# Altium PCB MP3 Player.PcbDoc
Units mil, origin at the board's own origin, x right, y up, seen from the top; angles counter-clockwise.
Board outline 1874.02 x 3145.67 mil, 2 copper layers (Top Layer, Bottom Layer); 47 components, 66 nets, 295 pads, 155 vias.
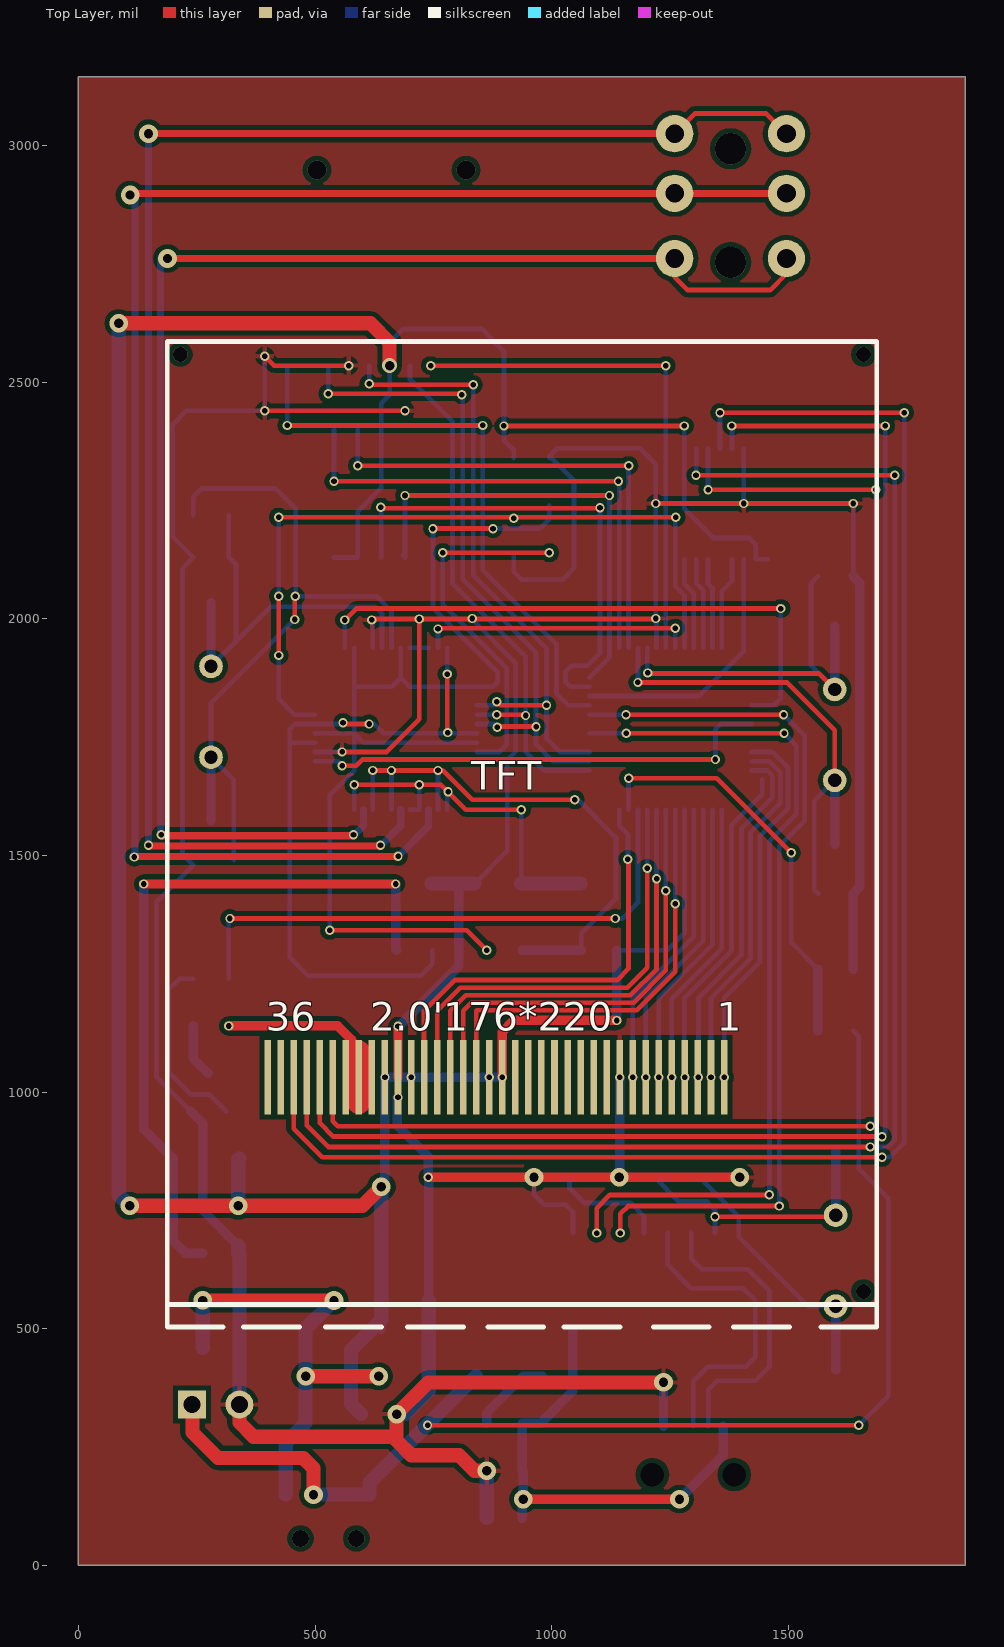
[diagram p0: Top Layer view]
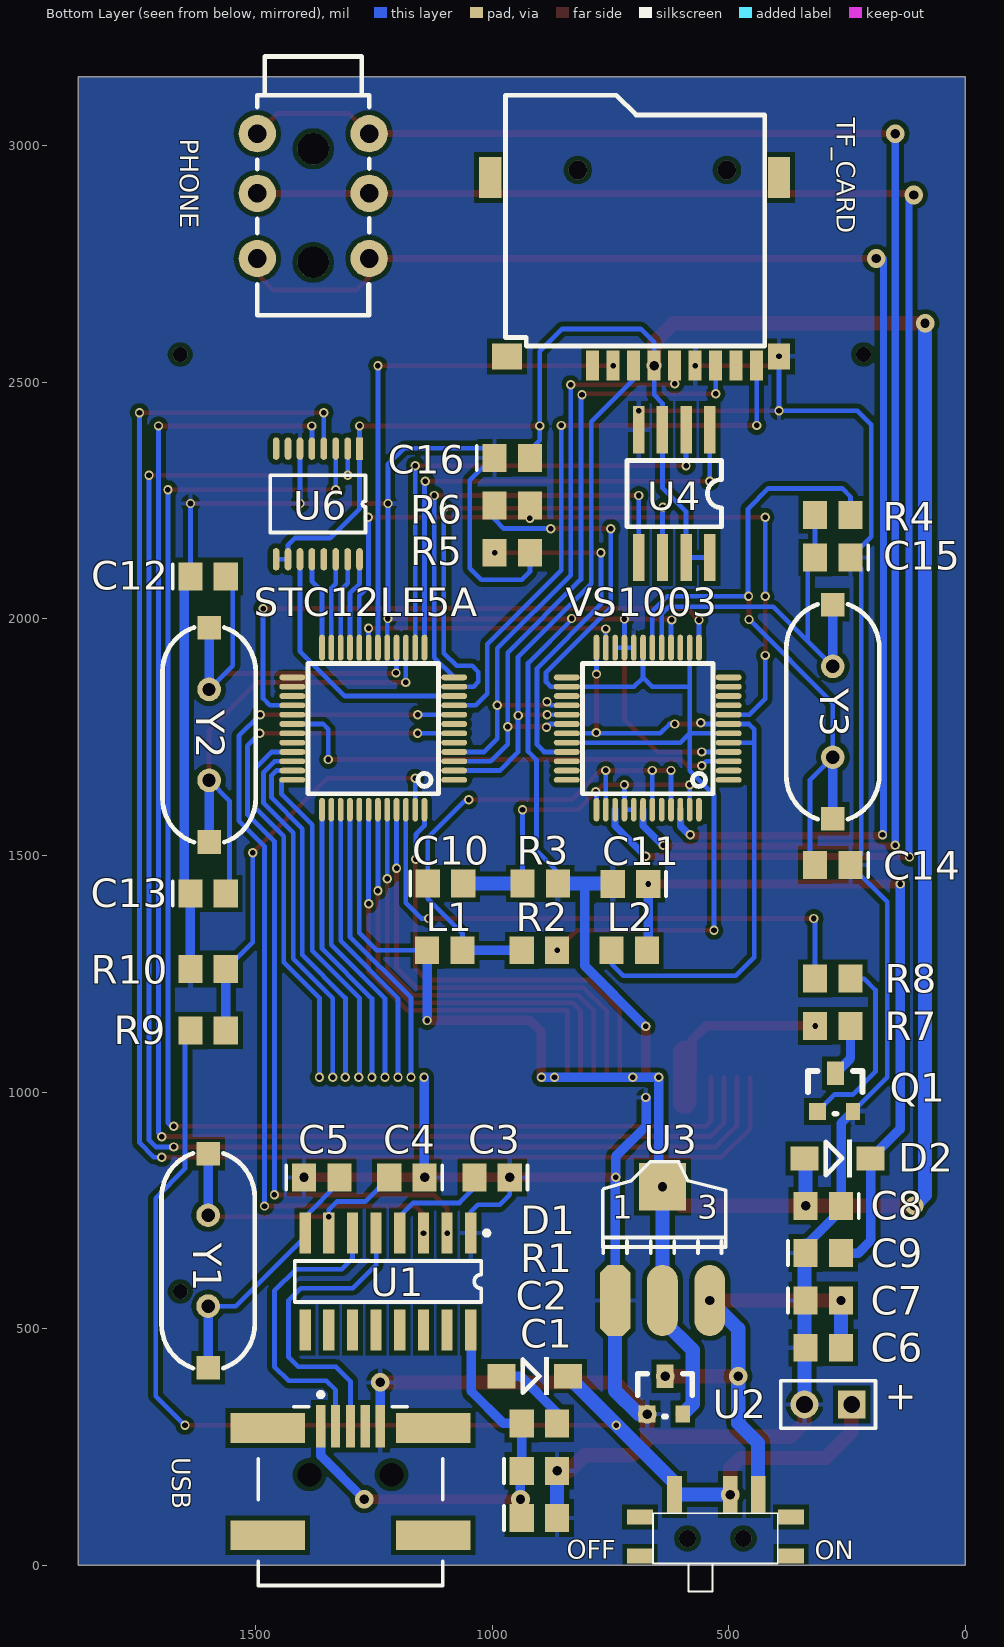
[diagram p1: Bottom Layer view, seen from below]

## Layer stack, top to bottom
Top Layer: signal copper 1.4
Dielectric: dielectric 12.6, FR-4, Dk 4.8
Bottom Layer: signal copper 1.4

## Board outline
0,0 1874.02,0 1874.02,3145.67 0,3145.67

## Design rules (kind name [scope] priority, off if disabled: settings)
Clearance [All] p1: gap=5
PolygonConnect [All] p1: connectstyle=Relief reliefconductorwidth=10 reliefentries=4 polygonreliefangle="90 Angle"
RoutingVias [All] p1: holewidth=28 width=50 viastyle="Through Hole" minholewidth=28 minwidth=50 maxholewidth=28 maxwidth=50
SilkscreenOverComponentPads [All] p1: minsilkscreentomaskgap=10
SolderMaskExpansion [All] p1: expansion=4
Width [All] p1: maxlimit=50 minlimit=10 preferedwidth=30 minimp=50.000000 maximp=50.000000 favimp=50.000000
27 further rules are at their usual default settings.

## Classes and differential pairs
component class Sheet1.~(162): C1 C2 C3 C4 C5 C6 C7 C8 C9 C10 C11 C12 C13 C14 C15 C16 D1 D2 U1

## Components (designator, comment, footprint, x,y, rotation, side; value= is the part's Value field where it differs from the comment)
+ "Header 2" HDR1X2 240,340 r0 bottom
C1 "Cap_NonPol" C0805 900,100 r180 bottom
C2 "Cap_NonPol" C0805 900,200 r180 bottom
C3 "Cap_NonPol" C0805 1000,820 r0 bottom
C4 "22pF" C0805 1180,820 r0 bottom
C5 "22pF" C0805 1360,820 r180 bottom
C6 "Cap_Pol2" 2012[0805] 300,460 r0 bottom
C7 "Cap_NonPol" C0805 300,560 r180 bottom
C8 "Cap_NonPol" C0805 300,760 r0 bottom
C9 "Cap_NonPol" C0805 300,660 r180 bottom
C10 "Cap_Pol2" C0805 1098.4,1441 r180 bottom
C11 "Cap_Pol2" C0805 707.4,1440 r0 bottom
C12 "Cap_NonPol" C0805 1600,2090 r180 bottom
C13 "Cap_NonPol" C0805 1600,1420 r180 bottom
C14 "Cap_NonPol" C0805 280,1480 r0 bottom
C15 "Cap_NonPol" C0805 280,2130 r0 bottom
C16 "Cap_NonPol" C0805 957.4,2340 r180 bottom
D1 "1N4148" DIODE_SOP 980,400 r180 bottom
D2 "1N4148" DIODE_SOP 340,860 r180 bottom
KEY1 "MK12C02(拨动开关)" MK12C02(拨动开关) 660,3.94 r180 bottom
L1 "Inductor" 2012[0805] 1100,1300 r180 bottom
L2 "Inductor" 2012[0805] 710,1300 r0 bottom
PHONE "PHONE_M" PHONE_ST 1377.95,2893.7 r90 bottom
Q1 "NPN" SOT-23 360,1080 r180 bottom
R1 "Res" 2012[0805] 900,300 r0 bottom
R2 "Res" 2012[0805] 900,1300 r180 bottom
R3 "Res" 2012[0805] 898.4,1441 r180 bottom
R4 "Res" 2012[0805] 280,2220 r180 bottom
R5 "Res" 2012[0805] 957.4,2140 r0 bottom
R6 "Res Semi" 2012[0805] 957.4,2240 r180 bottom
R7 "Res" 2012[0805] 280,1140 r0 bottom
R8 "Res" 2012[0805] 280,1240 r180 bottom
R9 "Res" 2012[0805] 1600,1130 r180 bottom
R10 "Res" 2012[0805] 1600,1260 r0 bottom
STC12LE5A "STC12LE5A60S2_QFP48" VS1003 1080,1660 r90 bottom
TF_CARD "SD卡" microSD_ZISUO 393.7,2933.07 r0 bottom
TFT "LCD_176*220_2.0''(LG)" LCD_2.0''_176*220pix(LG4525) 187.4,551.18 r0 top
U1 "CH340G" SOP16M 1220,600 r0 bottom
U2 "XC6206" SOT-23 720,440 r180 bottom
U3 "AMS1117-3.3" AMS1117 740,560 r180 bottom
U4 "W25Q64" SOIC-8 540,2400 r270 bottom
U6 "AD7843" TSSOP16 1280,2360 r270 bottom
USB "USB" USB/SM0.8-6H5 1299.21,-14.96 r270 bottom
VS1003 "VS1003" VS1003 500,1660 r90 bottom
Y1 "12MHz" XTAL_US 1600,740 r270 bottom
Y2 "33.1776MHz" XTAL_US 1598,1851.13 r270 bottom
Y3 "12.288MHz" XTAL_US 280,1900 r270 bottom

## Footprints (in the part's own frame and the unit in brackets; to place one, negate y for a bottom-side part, rotate by r counter-clockwise, add the part's x,y. Pads: shape width x height; smd on the part's side, far side on the other; paste and mask are expansions set on the pad)
2012[0805] [mm]
  rect 1.3x1.5 smd: 1(-0.95,0) 2(0.95,0)
AMS1117 [mil]
  oct 65x150 smd: 1(0.03,-0.06)
  oval 65x150 smd: 2(100.03,-0.06) 3(200.03,-0.06)
  rect 100x100 smd: 4(100.03,239.94)
  silkscreen extent -26,100 234,293
C0805 [mm]
  rect 1.3x1.5 smd: 1(-0.95,0) 2(0.95,0)
  silkscreen extent -1.9,-0.65 -1.9,0.65
DIODE_SOP [mm]
  rect 1.5x1.3 smd: 1(0,0) 2(3.556,0)
  silkscreen extent 1.14,-1.02 2.56,1.02
HDR1X2 [mm] "Connector; Header; 2 Position"
  rect 1.5x1.5 hole 0.9: 1(0,0)
  round 1.5 hole 0.9: 2(2.54,0)
  silkscreen extent -1.27,-1.27 3.81,1.27
LCD_2.0''_176*220pix(LG4525) [mm]
  rect 0.35x4 smd: 1(29.89,12.2) 2(29.19,12.2) 3(28.49,12.2) 4(27.79,12.2) 5(27.09,12.2) 6(26.39,12.2) 7(25.69,12.2) 8(24.99,12.2) 9(24.29,12.2) 10(23.59,12.2) 11(22.89,12.2) 12(22.19,12.2) 13(21.49,12.2) 14(20.79,12.2) 15(20.09,12.2) 16(19.39,12.2) 17(18.69,12.2) 18(17.99,12.2) 19(17.29,12.2) 20(16.59,12.2) 21(15.89,12.2) 22(15.19,12.2) 23(14.49,12.2) 24(13.79,12.2) 25(13.09,12.2) 26(12.39,12.2) 27(11.69,12.2) 28(10.99,12.2) 29(10.29,12.2) 30(9.59,12.2) 31(8.89,12.2) 32(8.19,12.2) 33(7.49,12.2) 34(6.79,12.2) 35(6.09,12.2) 36(5.39,12.2)
  silkscreen extent 0,-1.2 38.08,51.7
microSD_ZISUO [mm]
  rect 0.7x1.6 smd: 1(10,10.1) 2(8.9,10.1) 3(7.8,10.1) 4(6.7,10.1) 5(5.6,10.1) 6(4.5,10.1) 7(3.4,10.1) 8(2.3,10.1) 9(1.2,10.1)
  rect 1.2x1.4 smd: 10(0,9.6)
  rect 1.6x1.4 smd: 11(14.6,9.6)
  rect 1.2x2.2 smd: 12(0,0) 13(15.5,0)
  silkscreen extent 0.76,-4.42 14.68,9.04
MK12C02(拨动开关) [mm]
  rect 0.8x2 smd: 1(1.15,3.7) 2(4.15,3.7) 3(5.65,3.7)
  rect 1.4x0.8 smd: 4(-0.7,2.5) 5(-0.7,0.4) 6(7.4,0.4) 7(7.4,2.5)
  silkscreen extent 0,-1.5 6.7,2.7
PHONE_ST [mm]
  round 1.676 hole 1.676: 0(-3.556,0) 0(2.54,0)
  round 2 hole 1: 1(-3.35,-3) 1(-3.35,3) 2(0.15,-3) 2(0.15,3) 3(3.35,-3) 3(3.35,3)
  silkscreen extent -6.39,-3.01 7.49,3
SOIC-8 [mil]
  rect 100x24 smd: 1(0,0) 2(0,-50.06) 3(0,-100.06) 4(0,-150.06) 5(270,-150) 6(270,-100) 7(270,-50) 8(270,0)
  silkscreen extent 65,-175 205,25
SOP16M [mm]
  rect 0.6x2.2 smd: 1(-4.445,-2.6) 2(-3.175,-2.6) 3(-1.905,-2.6) 4(-0.635,-2.6) 5(0.635,-2.6) 6(1.905,-2.6) 7(3.175,-2.6) 8(4.445,-2.6) 9(4.445,2.6) 10(3.175,2.6) 11(1.905,2.6) 12(0.635,2.6) 13(-0.635,2.6) 14(-1.905,2.6) 15(-3.175,2.6) 16(-4.445,2.6)
  silkscreen extent -5.42,-2.72 5,1.1
SOT-23 [mil]
  rect 36x36 smd: 1(47.76,-120.28)
  rect 30x36 smd: 2(122.76,-120.28)
  rect 36x50 smd: 3(85.76,-40.28)
  silkscreen extent 28,-125 143,-35
TSSOP16 [mm]
  rect 1.2x0.36 smd: 1(0,0)
  oval 1.2x0.36 smd: 2(0,-0.64) 3(0,-1.28) 4(0,-1.92) 5(0,-2.56) 6(0,-3.2) 7(0,-3.84) 8(0,-4.48) 9(5.94,-4.48) 10(5.94,-3.84) 11(5.94,-3.2) 12(5.94,-2.56) 13(5.94,-1.92) 14(5.94,-1.28) 15(5.94,-0.64) 16(5.94,0)
  silkscreen extent 1.43,-4.8 4.5,0.32
USB/SM0.8-6H5 [mm]
  rect 2.3x0.5 smd: 1(-7.85,-1.6) 2(-7.85,-0.8) 3(-7.85,0) 4(-7.85,0.8) 5(-7.85,1.6)
  rect 1.6x4 smd: 6(-7.75,4.45) 7(-1.996,4.45) 8(-7.75,-4.45) 9(-1.996,-4.45)
  round 0.6 hole 1.27 unplated: MH1(-5.25,2.2) MH2(-5.25,-2.2)
  silkscreen extent -9.67,-4.95 0.7,4.95
VS1003 [mil]
  oval 12x55 smd: 1(0,0) 2(19.68,0) 3(39.37,0) 4(59.06,0) 5(78.74,0) 6(98.43,0) 7(118.11,0) 8(137.8,0) 9(157.48,0) 10(177.17,0) 11(196.85,0) 12(216.54,0) 25(216.54,342.2) 26(196.85,342.2) 27(177.17,342.2) 28(157.48,342.2) 29(137.8,342.2) 30(118.11,342.2) 31(98.43,342.2) 32(78.74,342.2) 33(59.06,342.2) 34(39.37,342.2) 35(19.68,342.2) 36(0,342.2)
  oval 55x12 smd: 13(279.37,62.83) 14(279.37,82.52) 15(279.37,102.2) 16(279.37,121.89) 17(279.37,141.57) 18(279.37,161.26) 19(279.37,180.94) 20(279.37,200.63) 21(279.37,220.32) 22(279.37,240) 23(279.37,259.69) 24(279.37,279.37)
  oval 50x12 smd: 37(-62.83,279.37) 38(-62.83,259.69) 39(-62.83,240) 40(-62.83,220.32) 41(-62.83,200.63) 42(-62.83,180.94) 43(-62.83,161.26) 44(-62.83,141.57) 45(-62.83,121.89) 46(-62.83,102.2) 47(-62.83,82.52) 48(-62.83,62.83)
  silkscreen extent -30,33 246,309
XTAL_US [mil]
  rect 50x50 smd: 1(-130.32,0) 2(322.44,0)
  round 50 hole 28: 1(0,0) 2(192.13,0)
  Top Layer lines w20: 326.77,0 192.91,0 ; 0,0 -133.86,0
  silkscreen extent -131,-98 323,98

## Part data
+: "Header, 2-Pin"
C1 C2 C3 C7 C8 C9 C12 C13 C14 C15 C16: "Capacitor (Semiconductor SIM Model)"
C4 C5: library part C
C6 C10 C11: "Polarized Capacitor (Axial)"
D1 D2: library part D
Q1: "NPN Bipolar Transistor"
R1 R2 R3 R4 R5 R6 R7 R8 R9 R10: "Semiconductor Resistor"
STC12LE5A: library part 12C5A60S2_QFP48
TFT: "LCD_176*220_2.0''"
U1: "USB2UART"
U3: library part AMS1117
U4: library part W25X16, "W25X16;SST25VF016;MX25L1605"
U6: "TOUCH_AD7843"
USB: library part USB5
Y1 Y2 Y3: library part XTAL, "Crystal Oscillator"

## Via types
v1: diameter 19.68, hole 11.81, Top Layer to Bottom Layer, 127 vias
v2: diameter 39.37, hole 19.68, Top Layer to Bottom Layer, 20 vias
v3: diameter 31.5, hole 31.5, Top Layer to Bottom Layer, 3 vias
v4: diameter 39.37, hole 39.37, Top Layer to Bottom Layer, 2 vias
v5: diameter 35.43, hole 35.43, Top Layer to Bottom Layer, 2 vias
v6: diameter 31.5, hole 19.68, Top Layer to Bottom Layer, 1 vias

## Nets (pads, with @x,y where several pads share a name; then routed paths per layer and width w, separated by ;. In a path a pad name is that pad's centre, name@x,y a point inside that pad or via, vN(x,y) a via of type N, cw(c..) or ccw(c..) an arc to the next point about the centre after c; other vN are vias at no path point)
2V5: C9.2 C11.1 D2.2 L2.1 | length 1526.4
  Top Layer w20: v1(137.8,1440) v1(670,1440)
  Bottom Layer w20: v1(137.8,1440) 137.8,922.2 D2.2 200,686 226,660 C9.2 ; v1(670,1440) 670,1302.6 L2.1
3V3: C8.2 C16.2 D2.1 L1.1 STC12LE5A.41 TF_CARD.4 TFT.18 TFT.19 TFT.25 TFT.27 U2.2 U3.2 U3.4 U4.3 U4.7 U4.8 U6.1 U6.9 U6.10 | length 6971.3
  Top Layer w10: v1(899,2408) v1(1280,2408)
  Top Layer w20: v1(895.67,1031.5) 895.67,1127.67 919.6,1151.6 v1(1137.4,1151.6)
  Top Layer w30: v2(85,2625) 616.96,2625 657.48,2584.48 v6(657.48,2535.43) ; v2(108,760) v2(337.4,760) 600.03,760 v2(639.97,799.94)
  Bottom Layer w10: U4.8 U4.7 590,2227 640.06,2277.06 U4.3 640.06,2456.06 657.48,2473.48 v6(657.48,2535.43) 657.48,2584.48 686,2613 852,2613 899,2566 899,2378 920,2357 C16.2 ; v2(639.97,799.94) U3.4@647.64,807.61 ; L1.1 1244,1300 1280.63,1336.63 STC12LE5A.41 ; v1(1280,2408) U6.1 1280,2233 1342,2171 1417,2171 1431.18,2156.82 U6.10 U6.9
  Bottom Layer w20: U3.2@639.97,499.03 U3.2 ; U3.4@647.64,807.61 v1(647.64,1031.5) v1(702.76,1031.5) v1(868.11,1031.5) v1(895.67,1031.5) ; v1(1137.4,1151.6) L1.1
  Bottom Layer w30: v2(85,2625) 85,783 v2(108,760) ; v2(337.4,760) 337.4,857.4 D2.1 ; U2.2 576,340.97 576,455 639.97,518.97 U3.2 v2(639.97,799.94)
5V: C1.1 C2.1 R1.2 U1.16 USB.1 | length 989.3
  Top Layer w20: v2(940,140) v2(1270,140)
  Bottom Layer w20: C1.1 937.4,137.4 v2(940,140) 940,197.4 C2.1 R1.2 976,300 1044,368 1044,496.64 U1.16 ; v2(1270,140) 1362.2,232.2 USB.1
ADC: R9.2 R10.1 STC12LE5A.47 | length 874.5
  Top Layer w10: v1(1162.52,1663.52) 1348.48,1663.52 v1(1506,1506)
  Bottom Layer w10: STC12LE5A.47 v1(1162.52,1663.52) ; v1(1506,1506) 1506,1316.6 R10.1
  Bottom Layer w20: R9.2 R10.1
AGND: C10.2 R3.1 VS1003.37 VS1003.40 VS1003.41 VS1003.47 | length 819.7
  Top Layer w10: v1(582.52,1649.52) 765.85,1649.52 779.37,1636 818.2,1597.17 v1(935.8,1597.17)
  Bottom Layer w10: VS1003.47 v1(582.52,1649.52) ; VS1003.41 VS1003.40 v1(720.32,1649.68) ; VS1003.37 v1@779.37,1636 ; R3.1 v1(935.8,1597.17)
  Bottom Layer w30: R3.1 C10.2
  other v1: 781,1635
AVDD: C10.1 L1.2 R2.1 VS1003.38 VS1003.43 VS1003.45 | length 1207.9
  Top Layer w10: v1(621.89,1680) v1(661.26,1680) v1(759.69,1680) 769.9,1680 831.9,1618 v1(1049,1618)
  Bottom Layer w10: VS1003.45 v1(621.89,1680) ; VS1003.43 v1(661.26,1680) ; VS1003.38 v1(759.69,1680) ; v1@1056,1618 1135.8,1538.2 C10.1 1135.8,1408.8 1062.6,1335.6 L1.2
  Bottom Layer w20: R2.1 L1.2
BATTERY: +.1 D1.2 KEY1.1 KEY1.2 R9.1 | length 2665.5
  Top Layer w10: v1(737.63,296) v1(1649,296)
  Top Layer w30: +.1 241,339 241,281 295,227 475,227 496.61,205.39 v2(496.61,149.61)
  Bottom Layer w10: R9.1 1649,1118.4 1649,838 1711,776 1711,358 v1(1649,296)
  Bottom Layer w30: v2(496.61,149.61) KEY1.1 614.72,174.72 D1.2
BL_CTL: R8.1 STC12LE5A.46 | length 1201
  Top Layer w10: v1(320,1367) v1(1134,1367)
  Bottom Layer w10: R8.1 317.4,1364.4 v1(320,1367) ; v1(1134,1367) 1149,1367 1182.2,1400.2 STC12LE5A.46
CVDD: L2.2 VS1003.5 VS1003.7 VS1003.24 VS1003.31 | length 1485.2
  Top Layer w10: v1@559,1779 558.11,1778.11 v1(614,1778.11) ; v1@779.37,1758.43 v1(779.37,1883.63)
  Bottom Layer w10: VS1003.5 446.26,1738.74 ; v1@559,1779 558.11,1778.11 VS1003.7 457.11,1778.11 446.26,1767.26 446.26,1738.74 ; v1(614,1778.11) 624.89,1778.11 644.57,1758.43 VS1003.31 ; L2.2 747.4,1270.4 723,1246 485,1246 446.26,1284.74 446.26,1738.74 ; v1(779.37,1883.63) VS1003.24
  other v1: 780,1760 559,1781
DGND: +.2 C1.2 C2.2 C3.1 C4.1 C5.1 C6.2 C7.1 C8.1 C9.1 C11.2 C12.1 C13.1 C14.1 C15.1 C16.1 Q1.2 R3.2 R5.1 R10.2 STC12LE5A.17 TF_CARD.6 TF_CARD.10 TFT.9 TFT.26 U1.1 U2.1 U3.1 U4.4 U6.6 USB.5 VS1003.4 VS1003.16 VS1003.20 VS1003.21 VS1003.22 | length 11260.8
  Top Layer w10: v1(393.7,2439.94) v1(690.06,2439.94) ; v1(393.7,2555.12) 413.39,2535.43 v1(570.87,2535.43) ; v1(556.94,1719.06) 651.06,1719.06 720.32,1788.31 v1(720.32,2000) ; v1@621.89,1999.89 720.2,1999.89 v1(720.32,2000) ; v2(1142.6,820) v2@1143.7,821.1 ; v1(1220,2244) v1(1405.98,2244) v1(1637.4,2244) ; v1@1221.57,1998.57 1220.15,2000 832,2000 v1(720.32,2000)
  Top Layer w20: TFT.26 v1(675.2,1139.2) ; v1(739,820) v2(962.6,820) v2(1142.6,820) v2(1397.4,820)
  Top Layer w30: +.2 340,302 370,272 672.24,272 ; v2(862.6,200) 837,200 804,233 703,233 672.24,263.76 672.24,272 ; v2(1236.22,386.78) 739.3,386.78 v2(672.24,319.72) 672.24,272
  Bottom Layer w10: Q1.2 165,1031.97 165,1402.4 C14.1 220,1502.6 220,2107.4 C15.1 199,2173.6 199,2411 227.94,2439.94 v1(393.7,2439.94) v1(393.7,2555.12) ; VS1003.4 v1(556.94,1719.06) ; VS1003.16 v1@621.89,1999.89 ; VS1003.20 VS1003.21 ; v1(720.32,2000) VS1003.21 ; v1(739,820) v1@739.97,819.03 ; VS1003.22 VS1003.21 ; C11.2 C11.2@745.8,1441 ; v1@831,2000 924,1907 924,1720 906,1702 906,1510 R3.2@837,1441 ; R5.1 920,2100 937,2083 1023,2083 1047,2107 1047,2293 1000,2340 C16.1 994.8,2343.8 1012,2361 1186,2361 1220,2327 v1(1220,2244) 1220,2000.15 1221.57,1998.57 STC12LE5A.17 ; v2(962.6,820) 962.6,783.4 984,762 1030,762 1045,747 U1.1 ; v2(1142.6,820) C4.1@1143.7,821.1 ; v1(1405.98,2244) U6.6 ; C12.1@1637.4,2090 v1(1637.4,2244)
  Bottom Layer w20: Q1.2 262.6,934.37 C8.1 262.6,750.4 C9.1@337.4,675.6 ; v1@674,989 674,929 739,864 v1(739,820) ; v1(675.2,1139.2) 676.2,1139.2 804,1267 804,1441 ; U3.1 v1@739.97,819.03 ; C4.1@1143.7,821.1 v1(1143.7,1031.5) ; USB.5 v2(1236.22,386.78) ; R10.2 C13.1 1651,1433.6 1651,2076.4 C12.1
  Bottom Layer w30: C9.1 C9.1@337.4,675.6 ; +.2 C9.1@340,660 ; v2(672.24,319.72) 690.72,319.72 739.97,368.97 U3.1 ; C11.2@745.8,1441 804,1441 R3.2@837,1441 ; C1.2 v2(862.6,200)
  other v1: 675.2,989 620,1998 832,2001 1220.15,2001
DREQ: R6.2 STC12LE5A.20 VS1003.8 | length 1596.5
  Top Layer w10: v1(423,1923) v1(423,2048) ; v1(423,2215) v1@1261,2215
  Bottom Layer w10: v1(423,1923) 423,1831 456.2,1797.8 VS1003.8 ; v1(423,2048) v1(423,2215) ; v1@1261,2215 1261,2069 1280.63,2049.37 STC12LE5A.20
  other v1: 920,2213 1262,2215
FLASH_CS: STC12LE5A.13 U4.1 | length 1063.5
  Top Layer w10: v1(540,2291) v1@1142.83,2291
  Bottom Layer w10: v1(540,2291) U4.1 ; STC12LE5A.13 v1@1142.83,2291
  other v1: 1141,2291
FLASH_MISO: STC12LE5A.14 U4.2 | length 1033.1
  Top Layer w10: v1(590.06,2324.06) v1(1162.52,2324.06)
  Bottom Layer w10: v1(590.06,2324.06) U4.2 ; STC12LE5A.14 v1(1162.52,2324.06)
FLASH_MOSI: STC12LE5A.12 U4.5 | length 971.9
  Top Layer w10: v1(690,2261) v1(1122,2261)
  Bottom Layer w10: U4.5@685,2135 U4.5 v1(690,2261) ; STC12LE5A.12 1122,1918.54 v1(1122,2261)
FLASH_SCLK: STC12LE5A.11 U4.6 | length 1037.8
  Top Layer w10: v1@640,2234 v1@1102,2234
  Bottom Layer w10: U4.6 v1@640,2234 ; STC12LE5A.11 1039.15,1856.85 1029,1867 1029,1888 1042,1901 1075,1901 1102,1928 v1@1102,2234
  other v1: 1102,2235 639,2236
GBUF: PHONE.3 VS1003.42 | length 3473.4
  Top Layer w10: PHONE.3@1259.84,3025.59 1302.25,3068 1453.65,3068 PHONE.3@1496.06,3025.59
  Top Layer w15: v1@148,1520.19 v1@638.13,1520.19 ; v2(148,3025.59) PHONE.3@1259.84,3025.59
  Bottom Layer w15: v1@148,1520.19 v2(148,3025.59) ; v1@638.13,1520.19 680.94,1563 VS1003.42
  other v1: 148,1522 638.13,1522
IOVDD: R2.2 R6.1 VS1003.6 VS1003.14 VS1003.19 VS1003.26 VS1003.32 | length 2368.9
  Top Layer w10: v1(531,1342) 820.6,1342 v1(862.6,1300) ; v1(749,2191) v1(876,2191)
  Bottom Layer w10: VS1003.6 582.52,1758.43 ; v1(531,1342) 531,1628 582.52,1679.52 582.52,1758.43 ; VS1003.14 582.52,1857 ; VS1003.19 680.94,1876.06 ; v1(749,2191) 749,2024 886,1887 886,1867 875.85,1856.85 VS1003.26 700.15,1856.85 680.94,1876.06 ; VS1003.32 602.2,1738.74 582.52,1758.43 ; v1(876,2191) 975,2191 994.8,2210.8 R6.1 ; 582.52,1758.43 582.52,1857 ; 582.52,1857 661.89,1857 680.94,1876.06
LCD_CS: STC12LE5A.45 TFT.23 | length 956.2
  Top Layer w10: TFT.23 757.87,1172 806.87,1221 1159.63,1221 1201.89,1263.26 v1(1201.89,1473)
  Bottom Layer w10: v1(1201.89,1473) STC12LE5A.45
LCD_DB0: STC12LE5A.40 TFT.8 | length 619.1
  Bottom Layer w10: v1(1171.26,1031.5) 1171.26,1199.26 1300.32,1328.31 STC12LE5A.40
LCD_DB1: STC12LE5A.39 TFT.7 | length 615.9
  Bottom Layer w10: v1(1198.82,1031.5) 1198.82,1198.82 1320,1320 STC12LE5A.39
LCD_DB2: STC12LE5A.38 TFT.6 | length 612.6
  Bottom Layer w10: v1(1226.38,1031.5) 1226.38,1198.38 1339.69,1311.69 STC12LE5A.38
LCD_DB3: STC12LE5A.37 TFT.5 | length 609.3
  Bottom Layer w10: v1(1253.94,1031.5) 1253.94,1197.94 1359.37,1303.37 STC12LE5A.37
LCD_DB4: STC12LE5A.36 TFT.4 | length 697.8
  Bottom Layer w10: v1@1280,1031.5 1280,1199 1380,1299 1380,1565 1445,1630 STC12LE5A.36@1445,1661
  other v1: 1281.5,1031.5
LCD_DB5: STC12LE5A.35 TFT.3 | length 750.9
  Bottom Layer w10: v1(1310,1031.5) 1310,1199 1401,1290 1401,1557 1466,1622 1466,1670 1456.32,1679.68 STC12LE5A.35
LCD_DB6: STC12LE5A.34 TFT.2 | length 775.6
  Bottom Layer w10: v1(1336.61,1031.5) 1336.61,1198.61 1420,1282 1420,1548 1483,1611 1483,1676 1459.63,1699.37 STC12LE5A.34
LCD_DB7: STC12LE5A.33 TFT.1 | length 801
  Bottom Layer w10: v1(1364.82,1031.5) 1364.82,1199.82 1440,1275 1440,1541 1499.57,1600.57 1499.57,1685.43 1465.94,1719.06 STC12LE5A.33
LCD_RD: STC12LE5A.42 TFT.20 | length 937.8
  Top Layer w10: TFT.20 840.55,1172 841.55,1173 1179.51,1173 1260.94,1254.44 v1(1260.94,1398)
  Bottom Layer w10: v1(1260.94,1398) STC12LE5A.42
LCD_RS: STC12LE5A.44 TFT.22 | length 950.1
  Top Layer w10: TFT.22 785.43,1172 818.43,1205 1166.25,1205 1221.57,1260.32 v1(1221.57,1451)
  Bottom Layer w10: v1(1221.57,1451) STC12LE5A.44
LCD_RST: STC12LE5A.48 TFT.24 | length 953
  Top Layer w10: TFT.24 730.31,1172 795.31,1237 1138,1237 1162.52,1261.52 v1@1162.52,1492
  Bottom Layer w10: STC12LE5A.48 1142.83,1563.17 1161,1545 v1(1161,1492)
LCD_WR: STC12LE5A.43 TFT.21 | length 943.9
  Top Layer w10: TFT.21 812.99,1172 829.99,1189 1172.88,1189 1241.26,1257.38 v1(1241.26,1426)
  Bottom Layer w10: v1(1241.26,1426) STC12LE5A.43
LEFT: PHONE.1 VS1003.46 | length 3112.7
  Top Layer w10: PHONE.1@1259.84,2761.81 1259.84,2722.16 1287,2695 1462,2695 1496.06,2729.06 PHONE.1@1496.06,2761.81
  Top Layer w15: v1@173,1542 v1@581.2,1542 ; v2(188,2761.81) PHONE.1@1259.84,2761.81
  Bottom Layer w15: v1@173,1542 173,2761.81 v2(188,2761.81) ; v1@581.2,1542 602.2,1563 VS1003.46
  other v1: 175,1544 581.2,1544
NetC3_2: C3.2 U1.4 | length 240.3
  Bottom Layer w10: C3.2 1037.4,797.6 1069,766 1167,766 1195,738 U1.4
NetC4_2: C4.2 U1.7 Y1.1 | length 461.6
  Top Layer w10: v1(1345,737) 1597,737 Y1.1@1600,740
  Bottom Layer w10: C4.2 1268.4,769 1328,769 1345,752 U1.7
NetC5_2: C5.2 U1.8 Y1.2 | length 420.9
  Bottom Layer w10: C5.2 1322.6,809.4 1395,737 U1.8 1395,695 1542.13,547.87 Y1.2@1600,547.87
NetD1_1: D1.1 R1.1 | length 172.1
  Bottom Layer w20: R1.1 862.6,322.6 940,400 D1.1
NetQ1_1: Q1.1 R8.2 | length 392.3
  Bottom Layer w10: R8.2 214,1240 190,1216 190,1043 238,995 276.97,995 Q1.1
NetQ1_3: Q1.3 R7.1 | length 113.4
  Bottom Layer w20: R7.1 242.6,1071.37 Q1.3
NetR5_2: R5.2 VS1003.33 | length 755.7
  Top Layer w10: v1(770,2140) v1(994.8,2140)
  Bottom Layer w10: v1(770,2140) 770,2031 905,1896 905,1734 890.06,1719.06 VS1003.33
NetR7_2: R7.2 TFT.28 TFT.29 TFT.30 | length 445
  Top Layer w20: v1(317.4,1140) 548,1140 577,1111 577,1043.54
  Top Layer w50: TFT.29@592.52,978.52 TFT.29 TFT.29@592.52,1084.48
NetU1_5: U1.5 USB.3 | length 650.4
  Bottom Layer w10: U1.5 1245,635 1294,586 1404,586 1430,560 1430,440 1410,420 1330,420 1299.21,389.21 USB.3
NetU1_6: U1.6 USB.2 | length 633.7
  Bottom Layer w10: U1.6 1295,648.31 1317.31,626 1414,626 1460,580 1460,420 1430,390 1350,390 1330.71,370.71 USB.2
POWER: C6.1 C7.2 KEY1.3 U2.3 U3.3 | length 983.8
  Top Layer w30: v2(262.6,560) v2(539.97,559.94) ; v2@480.28,399.72 v2(634.24,399.72)
  Bottom Layer w30: C6.1 v2(262.6,560) ; KEY1.3@438,149.61 438,259 480,301 v2(480,400) 480,499.97 v2(539.97,559.94)
RIGHT: PHONE.2 VS1003.39 | length 3483.2
  Top Layer w10: PHONE.2@1495.46,2899 PHONE.2@1496.06,2899.61
  Top Layer w15: v2(109,2896) 117,2896 120,2899 PHONE.2@1495.46,2899 ; v1@119.17,1498.38 v1(675.38,1498.38)
  Bottom Layer w10: v2(109,2896) 117,2896 120,2899 v2@119.17,2893.17
  Bottom Layer w15: v1@119.17,1498.38 v2@119.17,2893.17 ; v1(675.38,1498.38) 740,1563 VS1003.39
  other v1: 118,1497
RXD: STC12LE5A.8 U1.3 | length 1871.8
  Top Layer w10: v1(1145,702.36) 1145,743 1161.41,759.41 v1@1480,759.41 ; v1(1157,1797.8) v1(1490,1797.8)
  Bottom Layer w10: STC12LE5A.8 v1(1157,1797.8) ; v1(1481,759.41) 1481,1520 1535,1574 1535,1752.8 v1(1490,1797.8)
SD_CD: STC12LE5A.9 TF_CARD.9 | length 1251.3
  Top Layer w10: v1(440.94,2409) v1(854,2409)
  Bottom Layer w10: v1(440.94,2409) TF_CARD.9 ; v1(854,2409) 854,2103 1010,1947 1010,1842 1034.52,1817.48 STC12LE5A.9
SD_CS: STC12LE5A.18 TF_CARD.2 | length 1093.2
  Top Layer w10: v1(744.09,2535.43) v1(1241.26,2535.43)
  Bottom Layer w10: STC12LE5A.18 v1(1241.26,2535.43)
SD_MISO: STC12LE5A.3 TF_CARD.7 VS1003.30 | length 1404.6
  Top Layer w10: v1(527.56,2476) v1@812,2476 ; v1@885,1773 v1@967,1773
  Bottom Layer w10: v1(527.56,2476) TF_CARD.7 ; v1@812,2476 812.19,2475.81 812.19,2083.66 967,1928.85 967,1735 1002.63,1699.37 STC12LE5A.3 ; VS1003.30 877.89,1778.11 v1(885,1771)
  other v1: 967,1772 810,2474
SD_MOSI: STC12LE5A.2 TF_CARD.3 VS1003.29 | length 1171.5
  Top Layer w10: v1(883.8,1797.8) v1@944.8,1797.8
  Bottom Layer w10: TF_CARD.3 700.79,2506.21 790.38,2416.62 790.38,2074.62 945,1920 945,1719 984.32,1679.68 STC12LE5A.2 ; VS1003.29 v1(883.8,1797.8)
  other v1: 944.8,1796
SD_SCLK: STC12LE5A.4 TF_CARD.5 VS1003.28 | length 1327.9
  Top Layer w10: v1@614.17,2495 v1@833.83,2495 ; v1(884,1825) 891.52,1817.48 v1(989,1817.48)
  Bottom Layer w10: v1@614.17,2495 TF_CARD.5 ; v1(834,2495) 834,2092.69 989,1937.69 989,1747 1016.94,1719.06 STC12LE5A.4 ; VS1003.28 876.48,1817.48 v1(884,1825)
  other v1: 614.17,2497
TOUCH_CLK: STC12LE5A.21 U6.16 | length 195.2
  Bottom Layer w10: U6.16 1280,2075 1300.32,2054.68 STC12LE5A.21
TOUCH_CS: STC12LE5A.22 U6.15 | length 192.9
  Bottom Layer w10: U6.15 1305.2,2075.8 1320,2061 STC12LE5A.22
TOUCH_DI: STC12LE5A.23 U6.14 | length 190.6
  Bottom Layer w10: U6.14 1330.39,2074.61 1339.69,2065.31 STC12LE5A.23
TOUCH_DO: STC12LE5A.24 U6.12 | length 195.6
  Bottom Layer w10: STC12LE5A.24 1359.37,2058.37 1380.79,2079.79 U6.12
TOUCH_IRQ: STC12LE5A.10 U6.11 | length 559.4
  Bottom Layer w10: STC12LE5A.10 1311.17,1837.17 1406,1932 U6.11
TXD: STC12LE5A.6 U1.2 | length 1844
  Top Layer w10: v1(1095,702.36) 1095,755 1123,783 v1@1454,783 ; v1(1157.43,1758.43) v1(1491,1758.43)
  Bottom Layer w10: STC12LE5A.6 v1(1157.43,1758.43) ; v1(1460,783) 1460,1530 1517,1587 1517,1732.43 v1(1491,1758.43)
VS_CS: STC12LE5A.19 VS1003.23 | length 584
  Top Layer w10: v1@759.69,1980.69 v1(1261,1980.69)
  Bottom Layer w10: VS1003.23 v1@759.69,1980.69 ; STC12LE5A.19 v1(1261,1980.69) v1(1261,1980.69)
  other v1: 759.69,1979
X+: TFT.33 U6.2 | length 3250.3
  Top Layer w10: TFT.33 482.28,929.72 527.62,884.38 v1(1673,884.38) ; v1(1305,2303.5) v1(1725,2303.5)
  Bottom Layer w10: v1@1305.2,2303.5 U6.2 ; v1(1673,884.38) 1710.38,884.38 1725,899 v1(1725,2303.5)
X-: TFT.34 U6.4 | length 3444.7
  Top Layer w10: TFT.34 454.72,923.28 515.43,862.57 v1(1698,862.57) ; v1(1355.59,2436) v1(1745,2436)
  Bottom Layer w10: U6.4 v1(1355.59,2436) ; v1(1698,862.57) 1714.57,862.57 1745,893 v1(1745,2436)
XDCS: STC12LE5A.28 VS1003.13 | length 1247.4
  Top Layer w10: v1(562.83,1997.83) 587,2022 v1(1484,2022)
  Bottom Layer w10: VS1003.13 v1(562.83,1997.83) ; STC12LE5A.28 1469.48,1817.48 1484,1832 v1(1484,2022)
XRESET: STC12LE5A.30 VS1003.3 | length 1000.1
  Top Layer w10: v1(557,1690) 587,1690 600,1703 v1(1346,1703)
  Bottom Layer w10: VS1003.3 547.63,1699.37 v1(557,1690) ; v1(1346,1703) 1346,1767 1357.11,1778.11 STC12LE5A.30
XT1: C15.2 R4.1 VS1003.17 Y3.1 | length 765.3
  Bottom Layer w10: Y3.1@280,1900 333,1953 ; R4.1 C15.2 333,2114.4 333,1953 ; VS1003.17 641.57,2011.43 627,2026 406,2026 333,1953
XT2: C14.2 R4.2 VS1003.18 Y3.2 | length 1409.6
  Top Layer w10: v1(457,1999) 457,2047 v1(458,2048)
  Bottom Layer w10: R4.2 242.6,2258.6 260,2276 416,2276 459,2233 v1@459,2048 ; C14.2@328,1490.6 328,1659.87 280,1707.87 280,1822 v1(457,1999) ; v1(458,2048) v1@459,2048 ; VS1003.18 661.26,2016.74 630,2048 v1@459,2048
XTAL1: C13.2 STC12LE5A.15 Y2.2 | length 897
  Top Layer w10: v1(1182.2,1866) 1497,1866 1598,1765 Y2.2@1598,1659
  Bottom Layer w10: v1(1182.2,1866) STC12LE5A.15 ; C13.2 1555,1427.6 1555,1616 Y2.2@1598,1659
XTAL2: C12.2 STC12LE5A.16 Y2.1 | length 730.1
  Top Layer w10: v1@1201.89,1885 1564.13,1885 Y2.1@1598,1851.13
  Bottom Layer w10: v1@1201.89,1885 STC12LE5A.16 ; C12.2 1548,2075.4 1548,1901.13 Y2.1@1598,1851.13
  other v1: 1203,1886
Y+: TFT.31 U6.3 | length 3027.2
  Top Layer w10: TFT.31 537.4,938.6 548,928 v1(1673,928) ; v1(1330.39,2273) v1(1685,2273)
  Bottom Layer w10: v1(1330.39,2273) U6.3 ; v1(1673,928) 1677.61,928 1685,935.39 v1(1685,2273)
Y-: TFT.32 U6.5 | length 3173.4
  Top Layer w10: TFT.32 509.84,935.16 538.81,906.19 v1(1698,906.19) ; v1(1380.79,2408) v1(1705,2408)
  Bottom Layer w10: U6.5 v1(1380.79,2408) ; v1(1698,906.19) 1705,913.19 v1(1705,2408)
pads on no net: KEY1.4 KEY1.5 KEY1.6 KEY1.7 PHONE.0 STC12LE5A.1 STC12LE5A.5 STC12LE5A.7 STC12LE5A.25 STC12LE5A.26 STC12LE5A.27 STC12LE5A.29 STC12LE5A.31 STC12LE5A.32 TF_CARD.1 TF_CARD.8 TF_CARD.11 TF_CARD.12 TF_CARD.13 TFT.10 TFT.11 TFT.12 TFT.13 TFT.14 TFT.15 TFT.16 TFT.17 TFT.35 TFT.36 U1.9 U1.10 U1.11 U1.12 U1.13 U1.14 U1.15 U6.7 U6.8 U6.13 USB.4 USB.6 USB.7 USB.8 USB.9 USB.MH1 USB.MH2 VS1003.1 VS1003.2 VS1003.9 VS1003.10 VS1003.11 VS1003.12 VS1003.15 VS1003.25 VS1003.27 VS1003.34 VS1003.35 VS1003.36 VS1003.44 VS1003.48
copper on no net:
  other v3: 1659.06,578.74 214.96,2559.06 1659.06,2559.06
  other v4: 503.94,2948.82 818.9,2948.82
  other v5: 469.06,57.09 587.17,57.09

## Polygon pours and split planes (outlines as drawn)
no net on Top Solder "Top Layer-No Net" (solid): 1874,0 1814,0 1814,3145.67 1874,3145.67
no net on Top Solder "Top Layer-No Net" (solid): 60,0 -0.01,0 -0.01,3145.67 60,3145.67
no net on Bottom Solder "Top Layer-No Net" (solid): 60,0 -0.01,0 -0.01,3145.67 60,3145.67
no net on Bottom Solder "Top Layer-No Net" (solid): 1874,0 1814,0 1814,3145.67 1874,3145.67
DGND on Top Layer "Top Layer-No Net" (solid, pour order 1001): 1874,3145.67 1874,0.01 1874.02,0 -0.01,0 -0.01,3145.67
DGND on Bottom Layer "Top Layer-No Net" (solid): 1874,3145.67 0,3145.67 -0.01,3145.66 -0.01,0 1874.02,0

## Silkscreen, mask and mechanical layers (free items; w line width, h text height)
Bottom Overlay:
  text "OFF" at 842,14 h39.37
  text "ON" at 318,13 h39.37
Top Solder:
  text "MP3 PLAYER" at 326,2805 h150
  text "By Plain" at 752,2660 h100
Mechanical 1:
  the board outline again, w10

## Dimensions
1874.02,3145.67 to 1874.02,0 on Top Overlay
1874.02,3145.67 to 0,3145.67 on Top Overlay

## Text inside footprints (layer, text, board x,y; h text height)
TFT: Top Overlay "1" at 1348.82,1129.92 h60; Top Overlay "36" at 396.06,1129.92 h60; Top Overlay "2.0'176*220" at 616.54,1129.92 h60
U3: Bottom Overlay "1" at 745.97,732.94 h50; Bottom Overlay "3" at 565.97,732.94 h50